# EAGLE board LilyPad_Simple_Power (EAGLE 7.2.0)
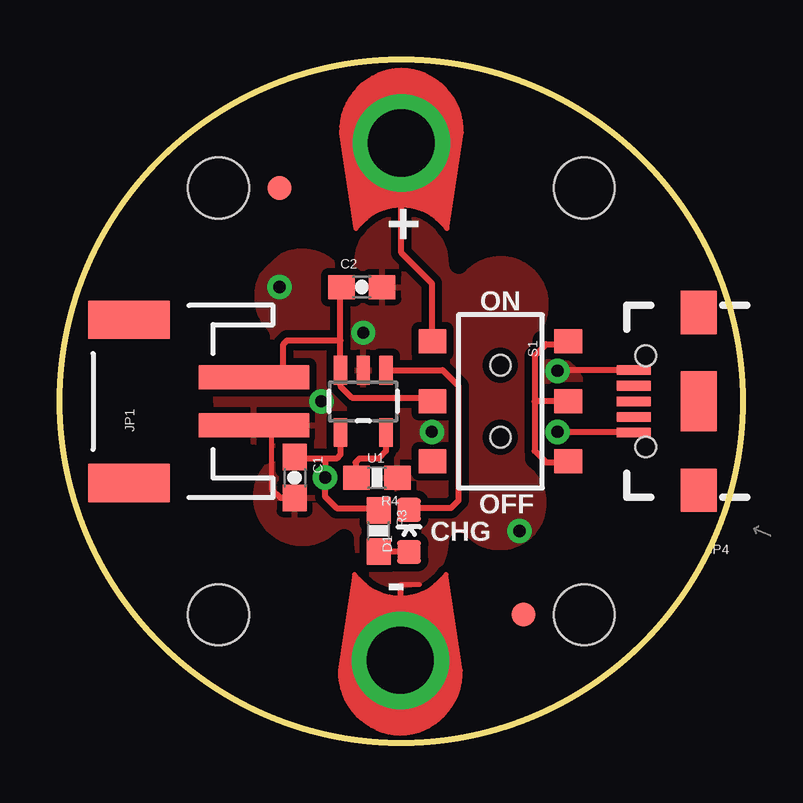
[diagram p0: board, top side]
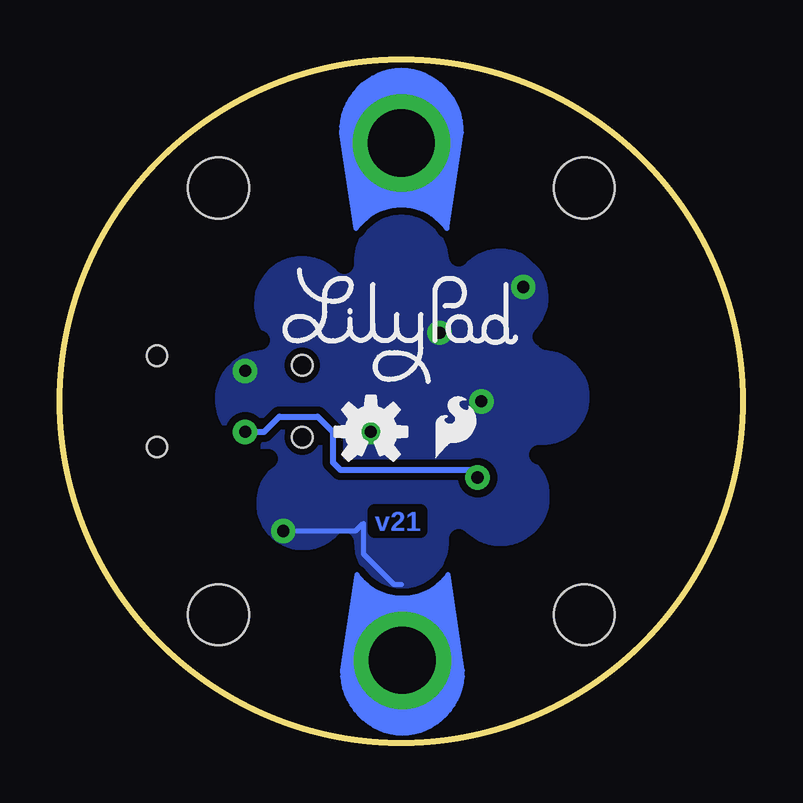
[diagram p1: board, bottom side, seen from below]

Size 28.45 x 28.45 mm. Coordinates in mm from the lower left corner, seen from the top.
Outline: circle at 14.22,14.22 radius 14.22
Copper layers (1*16): Top 0.035mm / dielectric 1.5mm / Bottom 0.035mm
Design rules "SparkFun-2-layer": minimum track width 7mil, minimum drill 15mil, track to track 8mil, track to pad 8mil, pad to pad 8mil, via to via 8mil, smd to smd 8mil, copper to edge 8mil, drill to drill 8mil, minimum pad ring 12mil, minimum via ring 10mil, stop-mask expansion 4mil, vias tented up to drill 20mil, thermal gap 10mil
tRestrict: area 2.9,2.9 to 25.6,25.6; 8 lines
bRestrict: area 2.9,2.9 to 25.6,25.6; 8 lines

## Footprints (pad centres in the part's own frame; a part is rotated, then mirrored left to right if it is on the bottom)
0603-CAP = smd 1.1 x 1: 1 -0.85,0; 2 0.85,0
LED-0603 = smd 1 x 1: A 0,-0.877; C 0,0.877
FIDUCIAL-1X2 = smd 1 x 1: 1 0,0
JST-2-SMD = smd 1 x 4.6: 1 -1,-3.7; 2 1,-3.7 | smd 1.6 x 3.4: NC1 -3.4,1.5; NC2 3.4,1.5
PETAL-LONG-1-2SIDE = drill 2.794 pad 4.064: 1 0.03,0
USB-B-MICRO-SMD_V03 = smd 1.4 x 0.4: D+1 2.7,0; D-1 2.7,0.65; GND1 2.7,-1.3; ID1 2.7,-0.65; VBUS1 2.7,1.3 | smd 1.5 x 1.8: SHIELD1 0,3.7; SHIELD2 0,-3.7 | smd 1.5 x 2.5: SHIELD3 0,0 | hole 0.85: 2.2,1.9; 2.2,-1.9
0603-RES = smd 1.1 x 1: 1 -0.85,0; 2 0.85,0
AYZ0202 = smd 1 x 1.15: 1 -2.5,2.825; 2 0,2.825; 3 2.5,2.825; 4 -2.5,-2.825; 5 0,-2.825; 6 2.5,-2.825 | hole 0.85: 1.5,0; -1.5,0
SEW-HOLE-NO-PAD = hole 2.54: 0,0
SOT23-5 = smd 0.55 x 1.2: 1 -0.95,-1.3; 2 0,-1.3; 3 0.95,-1.3; 4 0.95,1.3; 5 -0.95,1.3

## Placement (x,y rotation side)
C1  4.7uF  [0603-CAP]  9.78,11.05 270 top
C2  4.7uF  [0603-CAP]  12.57,18.99 0 top
D1  Yellow  [LED-0603]  14.54,8.83 0 top
FID1  FIDUCIAL1X2  [FIDUCIAL-1X2]  9.14,23.11 0 top
FID2  FIDUCIAL1X2  [FIDUCIAL-1X2]  19.3,5.33 0 top
FRAME1  [CREATIVE_COMMONS]  -10.01,-10.03 0 top  (outside the outline)
JP1  M02-JST-2MM-SMT  [JST-2-SMD]  4.38,14.22 90 top
JP2  SEWTAP9  [PETAL-LONG-1-2SIDE]  14.22,25.02 270 top
JP3  SEWTAP9  [PETAL-LONG-1-2SIDE]  14.18,3.4 90 top
JP4  USB_MICROB_PLUGCONN-11752  [USB-B-MICRO-SMD_V03]  26.61,14.22 180 top
JP5  SFE_LOGO_FLAME.1_INCH  [SFE_LOGO_FLAME_.1]  13.11,11.53 0 bottom
R3  330  [0603-RES]  13.27,8.83 270 top
R4  2.0k  [0603-RES]  13.21,11.05 180 top
S1  DPDT  [AYZ0202]  18.35,14.22 270 top
STANDOFF1  SEW-HOLE-NO-PAD  [SEW-HOLE-NO-PAD]  6.6,23.11 0 top
STANDOFF2  SEW-HOLE-NO-PAD  [SEW-HOLE-NO-PAD]  21.84,23.11 0 top
STANDOFF3  SEW-HOLE-NO-PAD  [SEW-HOLE-NO-PAD]  21.84,5.33 0 top
STANDOFF4  SEW-HOLE-NO-PAD  [SEW-HOLE-NO-PAD]  6.6,5.33 0 top
U1  MCP73831  [SOT23-5]  12.64,14.22 180 top
U$1  LOGO-LPLP  [LOGO-LILYPAD]  14.22,17.72 0 bottom
U$5  OSHW-LOGOS  [OSHW-LOGO-S]  15.49,12.95 0 bottom
U$6  REVISION  [REVISION]  1.52,-12.45 0 top  (outside the outline)

## Library data of the parts
C1 C2 = SparkFun-Capacitors; PROD_ID: CAP-08280
D1 = SparkFun-LED; PROD_ID: DIO-09003
FID1 FID2 JP5 U$5 U$6 = SparkFun-Aesthetics
FRAME1 = SparkFun-Aesthetics; DESIGNER: Nathan Seidle; VERSION: v21
JP1 = SparkFun-Connectors; PROD_ID: CONN-08352
JP2 JP3 U$1 = LilyPad-Wearables
JP4 = SparkFun-Connectors; PROD_ID: CONN-11752
R3 = SparkFun-Resistors; PROD_ID: RES-00818
R4 = SparkFun-Resistors; PROD_ID: RES-08296
S1 = SparkFun-Electromechanical; PROD_ID: SWCH-08179
STANDOFF1-STANDOFF4 = Local Library
U1 = SparkFun-PowerIC; PROD_ID: IC-09995

## Nets
GND: C1.2 C2.2 JP1.1 JP3.1 JP4.GND1 R4.1 U1.2
N$1: C2.1 JP1.2 S1.5 U1.3
N$3: C1.1 JP4.VBUS1 R3.1 U1.4
N$4: D1.C U1.1
N$5: D1.A R3.2
N$7: R4.2 U1.5
SINK1: S1.1 S1.2 S1.3
VCC: JP2.1 S1.4

## Tracks (layer width: path | path; a pad name or v marks a point on that pad's centre or on a via)
GND  (via drill 0.51)
  Top 0.203: 14.18,6.56 14.22,6.6 14.99,6.6 | 8.83,10.57 8.83,13.11 8.19,13.11 | 14.22,3.48 14.22,5.33
  Top 0.254: JP4.GND1 20.76,15.52 v20.73,15.49 | C1.2 9.2,10.2 8.83,10.57 | 14.18,6.56 14.18,5.38 14.22,5.33 | 14.22,3.48 JP3.1
  Bottom 0.203: v19.14,8.83 16.13,8.83 15.81,9.14 15.81,7.87 14.54,6.6 14.22,6.6 | 14.22,3.48 JP3.1
  Bottom 0.254: 15.81,13.91 15.49,13.59 v15.49,12.95
  other vias: 10.89,14.22 9.14,18.99 12.64,17.08
  pour Bottom (isolate 0.305): 0.25,28.19 0.25,0.25 28.19,0.25 28.19,28.19
  pour Top (isolate 0.305): 0.25,28.19 0.25,0.25 28.19,0.25 28.19,28.19
N$1
  Top 0.254: 15.21,13.91 S1.5 15.37,14.38 12.16,14.38 11.69,14.86 U1.3 11.69,16.76 | 11.69,16.76 11.69,18.95 C2.1 | 11.69,16.76 9.46,16.76 9.3,16.61 9.3,15.18 9.25,15.22 JP1.2
N$3  (via drill 0.51)
  Top 0.254: v20.73,12.95 23.88,12.95 JP4.VBUS1 | U1.4 11.69,12 11.53,11.84 11.05,11.84 | 11.05,11.84 9.84,11.84 C1.1 | 11.05,11.84 v11.05,11.05 11.05,10.25 11.53,9.78 13.17,9.78 R3.1
  Bottom 0.254: v11.05,11.05 11.37,11.37 16.76,11.37 17.08,11.68 17.08,12.95 17.72,13.59 19.3,13.59 19.94,12.95 v20.73,12.95
N$4
  Top 0.254: U1.1 15.94,15.52 16.61,14.86 16.61,10.1 16.29,9.78 14.62,9.78 D1.C
N$5
  Top 0.254: R3.2 14.51,7.98 D1.A
N$7
  Top 0.254: U1.5 13.59,12.16 13.27,11.84 12.48,11.84 12.32,11.68 12.32,11.09 R4.2
SINK1
  Top 0.254: S1.3 21.14,11.68 20.26,11.68 19.78,12.16 19.78,14.22 | S1.1 21.06,16.61 20.26,16.61 19.78,16.13 19.78,14.22 | S1.2 19.78,14.22
VCC
  Top 0.254: JP2.1 14.22,20.41 15.49,19.14 15.49,16.76 S1.4

## Text on the board
Bottom: v21
tPlace: + | ON | OFF | CHG | -
tDocu: N. Seidle | Toni Klopfenstein